# Altium PCB imx6_base_board_lcd7_r1.PcbDoc (part 2 of 6)
Units mil, origin at the board's own origin, x right, y up, seen from the top; angles counter-clockwise.
Board outline 7480.32 x 5118.11 mil, 4 copper layers (Top Layer, Internal Plane 1, Internal Plane 2, Bottom Layer), stack 30.635 mil thick; 518 components, 398 nets, 1886 pads, 1407 vias.
Unrouted connection lines stored in the file: 12.
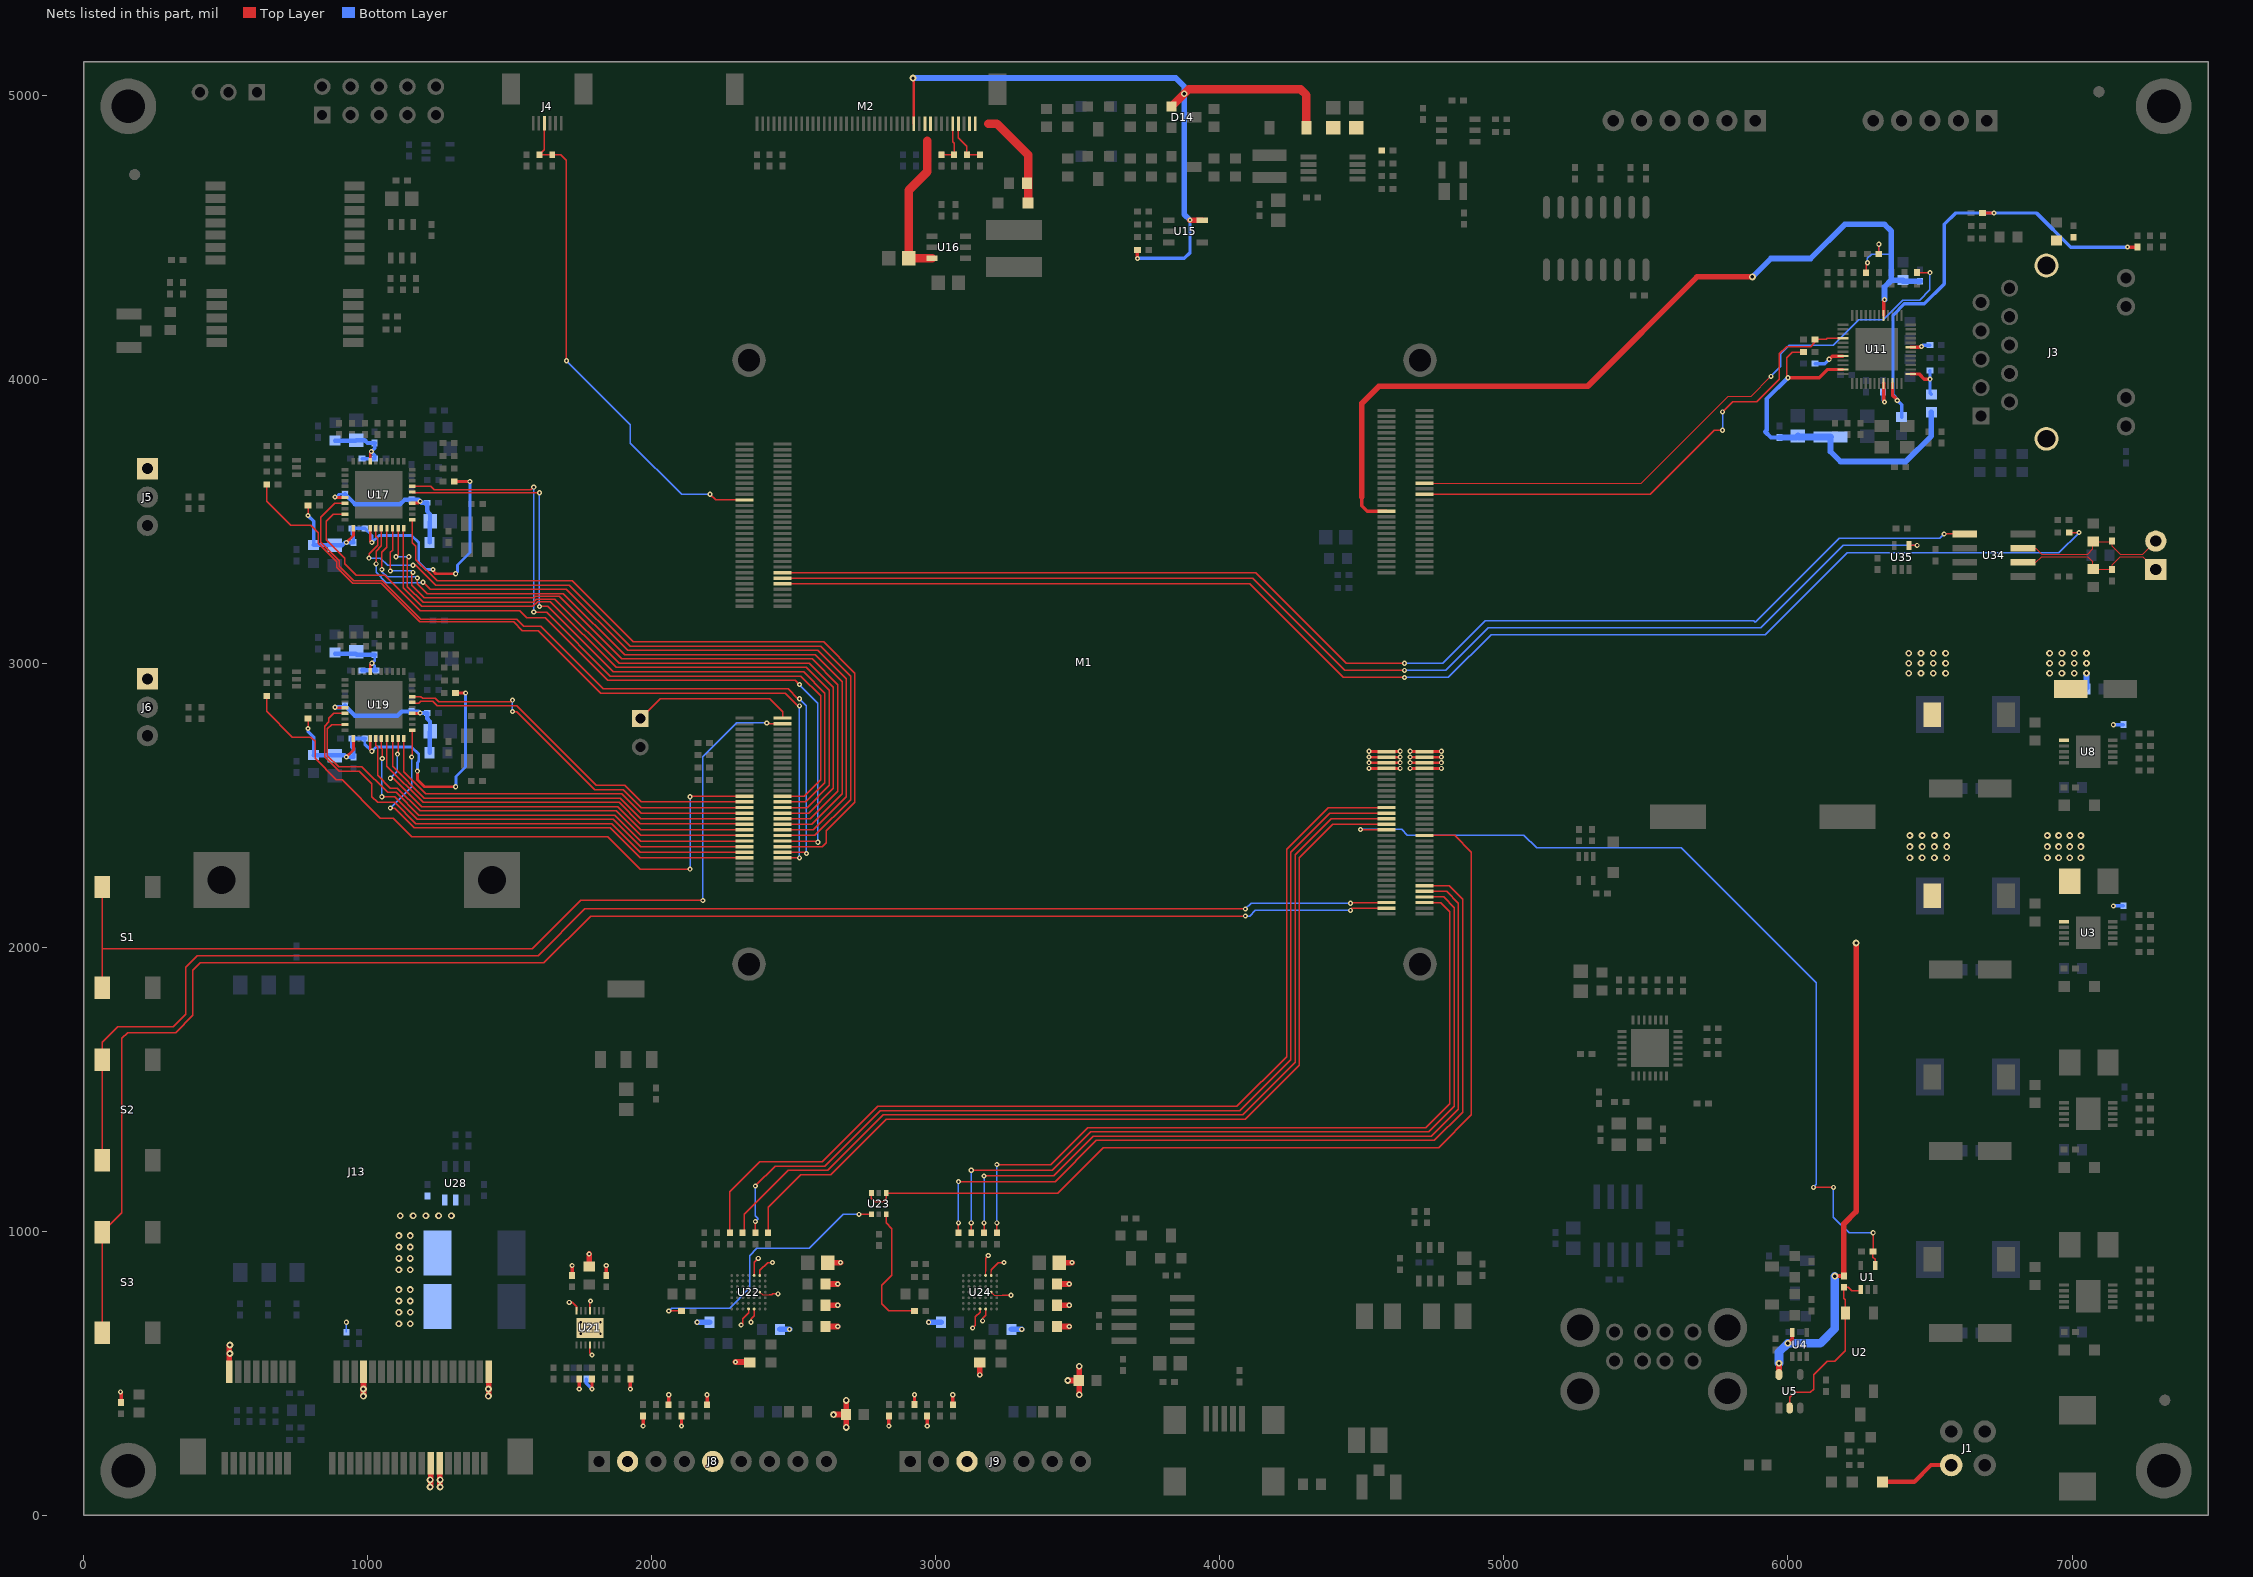
[diagram p4: the nets of this part, all layers, seen from the top]

## Part data
BT1: library part Battery, "Multicell Battery"
C1 C3 C4 C5 C7 C9 C10 C11 C13 C15 C16 C17 C19 C20 C22 C23 C25 C26 C27 C28 C29 C30 C31 C32 C33 C34 C35 C36 C37 C38 C39 C40 C41 C42 C43 C44 C45 C46 C48 C49 C50 C51 C52 C53 C54 C67 C68 C69 C70 C71 C72 C73 C74 C75 C76 C77 C78 C79 C80 C81 C82 C83 C84 C85 C86 C87 C88 C89 C90 C91 C92 C93 C94 C95 C96 C97 C98 C99 C100 C101 C102 C103 C104 C105 C106 C107 C108 C109 C110 C111 C112 C113 C114 C115 C116 C117 C118 C119 C120 C121 C122 C123 C124 C125 C126 C127 C128 C129 C130 C131 C132 C133 C134 C135 C136 C137 C138 C139 C140 C141 C142 C143 C144 C145 C146 C147 C148 C149 C150 C151 C152 C153 C154 C155 C156 C157 C158 C159 C160 C161 C162 C163 C164 C165 C166 C170 C174 C175: library part Cap, "Capacitor"
C2 C6 C8 C12 C14 C18 C21 C24 C183 C184: library part "CAP WP"
C47 C178 C179 C180 C181 C182 C185 C186 C187 C188 C189 C190 C191 C192 C193 C194 C195 C196 C197 C198: library part "P_CAP NP"
C55 C56: library part C2012X5R1E106K125AB, "CAP, CERM, 10 μF, 25 V, +/- 10%, X5R, 0805"
C57 C63: library part GRM219R61A106KE44D, "CAP, CERM, 10 μF, 10 V, +/- 10%, X5R, 0805"
C58 C61 C64: library part GRM188R61H105KAALD, "CAP, CERM, 1 μF, 50 V, +/- 10%, X5R, 0603"
C59: library part GRM155R71H332KA01D, "CAP, CERM, 3300 pF, 50 V, +/- 10%, X7R, 0402"
C60 C62 C65 C66: library part GRM155R71C104KA88D, "CAP, CERM, 0.1 μF, 16 V, +/- 10%, X7R, 0402"
C167 C168 C169 C171 C172 C173 C176 C177: library part CAP_Dup1
C199 C200 C201 C202 C203: library part CAP
D1 D3 D4 D5 D6 D7 D8 D9 D10 D11 D12 D19: library part "Diode 11DQ03", "Schottky Rectifier"
D2: library part MMGZ5231BPTLL34
D13 D20: library part LN01401_1
D14 D15: "Diode, Schottky, 30 V, 0.2 A, SOT-23"
D16: "Diode, Zener, 7.5 V, 200 mW, SOD-323F"
D17: library part MM3Z18VB, "Diode, Zener, 18 V, 200 mW, SOD-323F"
D18: "Diode, Schottky, 20 V, 1 A, SOD-123FL"
J1: library part "Header 4", "Header, 4-Pin"
J2 J18: library part "Header 2", "Header, 2-Pin"
J4 J20: library part "Header 6", "Header, 6-Pin"
J5 J6 J16: library part "Header 3", "Header, 3-Pin"
J8: library part "Header 9", "Header, 9-Pin"
J9: library part "Header 7", "Header, 7-Pin"
J10: library part "Header 12", "Header, 12-Pin"
J11: library part FOX_UH51543-JS7
J14 J15: library part HRS_U_0.FL-R-SMT-10
J17: library part "Header 5X2", "Header, 5-Pin, Dual row"
J19: library part "Header 5", "Header, 5-Pin"
L1 L2 L3 L4: library part INDUCTOR_A, "IND CHK PWR 2.2UH@1MHZ 3.2A 20% SMT"
L5 L7 L10 L11 L12 L13 L14 L15 L16 L17 L18 L19 L20 L21 L22 L23 L25: library part Inductor, "Inductor"
L6 L8 L9: library part INDUCTOR, "IND PWR 4.7UH@1MHZ 1A 20% SMD"
L24: library part 2.2UH_LPS3015-222MLC_1.5A_20%~D
Q1: library part MMBT3904_NL_SOT23-3
Q2 Q8: library part AO3401L_SOT23-3_0
Q3 Q4 Q5 Q9: library part MOSFET-N, "N-Channel MOSFET"
Q6: library part PNP, "PNP Bipolar Transistor"
Q7: library part NPN, "NPN Bipolar Transistor"
R1 R2 R3 R12 R31 R32 R33 R34 R35 R36 R37 R38 R39 R40 R41 R42 R43 R44 R45 R46 R47 R48 R49 R50 R51 R52 R53 R54 R55 R56 R57 R58 R82 R85 R87 R88 R89 R90 R91 R92 R93 R94 R95 R96 R97 R98 R99 R100 R101 R102 R103 R104 R105 R106 R107 R108 R109 R110 R111 R112 R113 R114 R115 R116 R117 R118 R119 R120 R121 R122 R123 R124 R125 R126 R127 R128 R129 R130 R131 R132 R133 R134 R135 R136 R137 R138 R139 R140 R141 R142 R143 R144 R145 R146 R147 R148 R149 R150 R151 R152 R153 R154 R155 R156 R157 R166 R168 R169 R187 R188 R189 R190: library part CR16-1003FM
R4 R6 R8 R9 R10 R11 R13 R14 R15 R16 R17 R18 R19 R20 R21 R22 R23 R24 R25 R26 R27 R28 R29 R30: library part Res3, "Resistor"
R5 R7: library part R
R59 R60 R61 R62 R63 R64 R65 R66 R67 R68 R69 R70 R71 R72 R73 R74 R75 R76 R77 R78 R79 R80 R81 R83 R84 R86 R158 R159 R160 R161 R162 R163 R164 R165 R167 R170 R171 R172 R173 R174 R175 R176 R177 R178 R179 R180 R181 R182 R183 R184 R185 R186: library part P_R
S1 S2 S3: library part SW-PB, "Switch"
U2: library part Optoisolator1, "4-Pin Phototransistor Optocoupler"
U3 U6 U7 U8: library part LT3680_MSOP_10P, "IC VREG STEP DOWN SW 2.4MHZ 3.5A 0.79V-30V 3.6V-36V MSOP10"
U5: library part 74LVC1G04GW_SOT353-5
U9: library part LD1117AS18, "IC VREG LDO 1.8V 1A 10V SOT-223"
U11: library part AR8031_QFN48, "IC XCVR ETHERNET PHY 10/100/1000G-BIT 3.3V QFN48"
U12 U28 U29 U32: library part TPS27081A
U13: library part TPS61085DGKR, "18.5 V, 2 A, 650 KHz / 1.2 MHz Step-Up DC-DC Converter with Forced PWM Mode, 2.3 to 6 V, -40 to 85 degC, 8-pin SOP (DGK8), Green (RoHS & no Sb/Br)"
U14: library part STM6315
U15: "Single 30V High Output Current and Unlimited Capacitive Load Op Amp"
U21: library part MAX9814_TDFN14, "IC LIN AGC AMP 2.7-5.5V TDFN14"
U22 U24: library part WM8962_BGA_49P_CUST, "IC AUDIO CODEC 24BIT DAC 2 CH ADC 1.8V BGA49"
U23: library part NC7WZ17, "IC BUF DUAL SCHMITT 1.65-5.5V SC70-6"
U25 U27: library part MIC2526_8P, "IC LIN SW PWR ACTIVE HIGH DUAL 2.7V-5.5V 0.5A SOIC8"
U30: library part NEO-5M
U34: library part TJA1040T_SO_8P, "IC XCVR CAN HS 5V SO8"
Y1: library part XTAL_13Y, "XTAL 25MHZ -- -- SMT"
Y2 Y3 Y4: library part CRYSTAL_JXS63, "XTAL 28.63636MHZ 10PF RSN -- SMT"

## Free pads (board coordinates)
  round 196.85 hole 118.11: MT1(7322.83,157.48) MT2(157.48,157.48) MT3(157.48,4960.63) MT4(7322.83,4960.63)

## Via types
v1: diameter 18, hole 8, Top Layer to Bottom Layer, tented both sides, 875 vias
v2: diameter 24, hole 12, Top Layer to Bottom Layer, tented both sides, 532 vias

## Nets (pads, with @x,y where several pads share a name; then routed paths per layer and width w, separated by ;. In a path a pad name is that pad's centre, name@x,y a point inside that pad or via, vN(x,y) a via of type N, cw(c..) or ccw(c..) an arc to the next point about the centre after c; other vN are vias at no path point)
2V5-RGMII: C30.1 R49.2 R50.2 U11.10 | length 1660.2
  Top Layer w12: U11.10@6368.07,3985.2 6368.07,3943.93 6385,3927 v1(6385,3925) ; R49.2@6684.87,4585 v1(6725,4585) ; v1(7195,4465) 7229.87,4465 R50.2@7230,4465.13
  Bottom Layer w12: C30.1@6400,3866.5 6400,3910 v1(6385,3925) 6385,3930 6370,3945 6370,4225 6410,4265 6480,4265 6550,4335 6550,4545 6590,4585 v1(6725,4585) 6875,4585 6995,4465 v1(7195,4465)
3V3-VIDEO1: C69.1 C79.1 C94.2 C95.2 L13.2 R89.2 R91.2 U17.1 U17.4 | length 1363.2
  Top Layer w4.7: v1(790,3520) 790.13,3520.13 R89.2@790.13,3555
  Top Layer w10: v1(925,3425) 950,3450 U17.1@950,3475 ; U17.4@1009.05,3475 1009.05,3430.94 v1(1015,3425) ; v1(1230,3330) 1230,3325 1240,3315 v1(1310,3315) ; R91.2@1304.87,3640 v1(1360,3640)
  Bottom Layer w10: C94.2@990.13,3475 1015,3450.13 v1(1015,3425) 1040,3450 1155,3450 1180,3425 1180,3355 1205,3330 v1(1230,3330) ; v1(1310,3315) 1316,3321 1316,3346 1360,3390 v1(1360,3640)
  Bottom Layer w12: v1(790,3520) 810,3500 L13.2@810,3416.5 ; C69.1@950,3425.13 950,3450 944.87,3455.13 C95.2@944.87,3475 C94.2@990.13,3475
  Bottom Layer w15: L13.2@810,3416.5 883.5,3416.5 C79.1@885,3415 910,3415 v1@920.13,3425.13 ; v1@925,3425.13 C69.1@950,3425.13
3V3-VIDEO2: C99.1 C100.1 C124.2 C125.2 L17.2 R102.2 R104.2 U19.1 U19.4 | length 1378.3
  Top Layer w4.7: v1(790,2770) 790,2765.25 790.13,2765.13 R102.2@790.13,2805
  Top Layer w10: v1(925,2670) 950,2695 U19.1@950,2735 ; U19.4@1009.05,2735 1009.05,2695.94 v1(1015,2690) ; v1(1175,2620) 1175,2590 1200,2565 v1(1310,2565) ; R104.2@1309.87,2895 v1(1345,2895)
  Bottom Layer w10: C124.2@990.13,2735 990.13,2714.87 v1(1015,2690) 1030,2705 1155,2705 1180,2680 1180,2655 1175,2650 v1(1175,2620) ; v1(1310,2565) 1311,2566 1311,2601 1345,2635 v1(1345,2895)
  Bottom Layer w12: v1(790,2770) 790,2760 810,2740 L17.2@810,2676.5
  Bottom Layer w15: L17.2@810,2676.5 918.5,2676.5 v1(925,2670) 949.87,2670 C99.1@950,2670.13 950,2700 944.87,2705.13 C125.2@944.87,2735 C124.2@990.13,2735
12V-CAM: C24.1 C25.1 J5.1 J6.1 L4.2 R28.1 U8.1 | length 92.4
  Bottom Layer w12: v1(7145.67,2783.46) 7146.11,2783.91 R28.1@7181.1,2783.91
  Bottom Layer w20: C25.1@7047.24,2909.45 7051.18,2913.39 v2(7051.18,2964.57)
  other v2: 6425.2,2964.57 6468.5,2964.57 6511.81,2964.57 6555.12,2964.57 6921.26,2964.57 6964.57,2964.57 7007.87,2964.57 6425.2,3000 6468.5,3000 6511.81,3000 6555.12,3000 6921.26,3000 6964.57,3000 7007.87,3000 7051.18,3000 6425.2,3035.43 6468.5,3035.43 6511.81,3035.43 6555.12,3035.43 6921.26,3035.43 6964.57,3035.43 7007.87,3035.43 7051.18,3035.43
ACC-INPUT: D2.1 J1.2 | length 266.6
  Top Layer w15: D2.1@6332.68,118.11 6444.88,118.11 6503.94,177.17 J1.2@6574.8,177.17
ACC-ISO: R2.2 U1.1 U2.4 U5.2 | length 622.3
  Top Layer w4.7: U5.2@6005.91,377.95 6005.91,415.35 6023.62,433.07 6078.74,433.07 6090.55,444.88 6090.55,496.06 6137.8,543.31 6165.35,543.31 6201.97,579.92 U2.4@6201.97,712.6 6201.97,758.66 6196.85,763.78 R2.2@6196.85,802.96 6212.79,802.96 6224.41,791.34 6251.97,791.34 U1.1@6255.91,795.28
ACC-STATUS: M1.D29 R3.2 U1.4 | length 3101
  Top Layer w4.7: v1(4495,2415) 4496.61,2413.39 M1.D29@4586.61,2413.39 ; v1(6090,1155) v1(6160,1155) ; v1(6300,995) 6300,929.73 R3.2@6299.4,929.13 6299.4,909.26 6307.1,901.56 U1.4@6307.1,880.28
  Bottom Layer w4.7: v1(4495,2415) 4640,2415 4660,2395 5070,2395 5115,2350 5625,2350 6100,1875 6100,1165 v1(6090,1155) ; v1(6160,1155) 6160,1050 6215,995 v1(6300,995)
AGND1: C128.1 C129.2 C131.2 C132.2 C133.1 C135.1 C139.1 C140.1 C145.1 C146.1 C148.1 J8.2 J8.5 L19.2 R117.2 R118.2 R119.2 R120.2 R121.2 R122.2 R123.2 U21.4 U21.7 U21.11 U21.15 U22.B1 U22.B4 U22.C1 U22.C7 U22.D7 | length 1294.7
  Top Layer w3: U22.B4@2380.31,785.94 2390.25,776 2414,776
  Top Layer w4.7: v1(1710,750) 1720,750 1735.52,734.48 U21.7@1735.52,720 ; U21.11@1782.76,599.92 1782.76,572.24 v1(1790,565) ; U21.4@1782.76,720 1782.76,752.76 v1(1785,755) ; v1(2315,670) 2320.3,675.3 2320.3,692.02 2340.94,712.66 U22.D7@2340.94,726.88 ; v1(2350,680) 2350,693 2360.3,703.3 2360.3,726.55 U22.C7@2360.63,726.88 ; U22.C1@2360.63,845 2360.7,845.07 2360.7,890.7 v1(2375,905) ; U22.B1@2380.31,845 2380.7,845.39 2380.7,862.7 2408,890 v1(2425,890) ; 2414,776 2423,776 2427,780 v1(2445,780)
  Top Layer w12: C128.1@1720,845.13 v1(1720,880) ; v1(1745,445) R119.2@1745,480.13 ; v1(1790,445) C129.2@1790,480.13 ; C132.2@1840,844.87 v1(1840,880) ; v1(1925,445) R117.2@1925,480.13 ; v1(1970,315) R121.2@1970,350.13 ; R120.2@2060,389.87 v1(2060,425) ; v1(2105,315) R122.2@2105,350.13 ; R123.2@2195,389.87 v1(2195,425)
  Top Layer w20: C131.2@1780,876.5 v1(1780,920) ; v1(2295,540) 2343.5,540 C148.1@2345,538.5 ; C146.1@2611.5,665 v1(2655,665) ; C145.1@2611.5,740 v1(2655,740) ; C135.1@2611.5,815 v1(2655,815) ; C133.1@2620,890 v1(2665,890) ; v2(2640,355) L19.2@2683.5,355 ; v2(2685,310) 2683.5,311.5 2685,312.99 v2(2685,405)
  Bottom Layer w12: R118.2@1770,480.13 1770,465 v1(1790,445)
  Bottom Layer w20: v1(2160,680) C139.1@2203.5,680 ; C140.1@2451.5,655 v1(2485,655)
  other v1: 1750,640 1820,640 1785,660 1750,680 1820,680
AGND2: C149.1 C151.1 C155.1 C156.1 C159.1 C160.1 C161.1 J9.3 L21.2 R131.2 R132.2 R133.2 R134.2 U24.B1 U24.B4 U24.C1 U24.C7 U24.D7 | length 924.4
  Top Layer w3: U24.C1@3175.63,845 3175.63,859.37 ; U24.B4@3195.31,785.94 3205.5,775.75 3234.25,775.75 ; U24.B1@3195.31,845 3195.31,859.69 ; v1@3264.25,775.75 3265,776.5 v1(3265,775)
  Top Layer w4.7: v1(3130,660) 3138.95,668.95 3138.95,698.95 3155.94,715.94 U24.D7@3155.94,726.88 ; v1(3165,685) 3165,695 3175.3,705.3 3175.3,726.55 U24.C7@3175.63,726.88 ; 3175.63,859.37 3175.63,905.63 v1(3185,915) ; 3195.31,859.69 3195.31,865.31 3220,890 v1(3240,890) ; 3234.25,775.75 v1@3264.25,775.75
  Top Layer w12: v1(2835,315) R134.2@2835,350.13 ; v1(2925,425) 2925.2,424.8 R131.2@2925.2,390.2 ; v1(2970,315) R132.2@2970,350.13 ; R133.2@3060,389.87 v1(3060,425)
  Top Layer w20: v1(3155,495) C161.1@3155,538.5 ; C160.1@3426.5,665 v1(3470,665) ; C159.1@3426.5,740 v1(3470,740) ; C151.1@3426.5,815 v1(3470,815) ; C149.1@3435,890 v1(3480,890) ; v2@3470,475 L21.2@3503.5,475 ; v2@3505,422.99 v2(3505,425) 3505,522.01 3503.5,523.5 v2(3505,525)
  Bottom Layer w20: v1(2975,680) C155.1@3018.5,680 ; C156.1@3266.5,655 v1(3302.65,655)
  other v2: 3465,475
AUD3-RXD: M1.D27 R129.2 | length 3252.8
  Top Layer w4.7: R129.2@2410,994.87 2410,1085 2525,1200 2630,1200 2825,1395 4090,1395 4280,1585 4280,2315 4398.07,2433.07 M1.D27@4586.61,2433.07
AUD3-TXC: M1.D21 R126.2 | length 3444.4
  Top Layer w4.7: R126.2@2275,994.87 2275,1140 2380,1245 2600,1245 2795,1440 4060,1440 4235,1615 4235,2345 4382.13,2492.13 M1.D21@4586.61,2492.13
AUD3-TXD: M1.D23 R128.2 | length 3366.3
  Top Layer w4.7: R128.2@2365,994.87 v1(2365,1035) ; v1(2365,1160) 2435,1230 2610,1230 2805,1425 4070,1425 4250,1605 4250,2335 4387.44,2472.44 M1.D23@4586.61,2472.44
  Bottom Layer w4.7: v1(2365,1035) 2375,1045 2365,1055 v1(2365,1160)
AUD3-TXFS: M1.D25 R127.2 | length 3333.3
  Top Layer w4.7: R127.2@2320,994.87 2325,999.87 2325,1060 2480,1215 2620,1215 2815,1410 4080,1410 4265,1595 4265,2325 4392.76,2452.76 M1.D25@4586.61,2452.76
AUD4-RXD: M1.D56 R140.2 | length 2702.2
  Top Layer w4.7: R140.2@3215,994.87 v1(3215,1030) ; v1(3215,1235) 3405,1235 3535,1365 4725,1365 4810,1450 4810,2125 4777.52,2157.48 M1.D56@4720.47,2157.48
  Bottom Layer w4.7: v1(3215,1030) v1(3215,1235)
AUD4-TXC: M1.D50 R137.2 | length 2960.4
  Top Layer w4.7: R137.2@3080,994.87 v1(3080,1030) ; v1(3080,1175) 3420,1175 3565,1320 4755,1320 4855,1420 4855,2170 4808.46,2216.54 M1.D50@4720.47,2216.54
  Bottom Layer w4.7: v1(3080,1030) v1(3080,1175)
AUD4-TXD: M1.D52 R139.2 | length 2829.3
  Top Layer w4.7: R139.2@3170,994.87 v1(3170,1030) ; v1(3170,1195) 3415,1195 3555,1335 4745,1335 4840,1430 4840,2155 4798.15,2196.85 M1.D52@4720.47,2196.85
  Bottom Layer w4.7: v1(3170,1030) v1(3170,1195)
AUD4-TXFS: M1.D54 R138.2 | length 2833.2
  Top Layer w4.7: R138.2@3125,994.87 v1(3125,1030) ; v1(3125,1215) 3410,1215 3545,1350 4735,1350 4825,1440 4825,2140 4787.83,2177.17 M1.D54@4720.47,2177.17
  Bottom Layer w4.7: v1(3125,1030) v1(3125,1215)
AUD-CLK-1: R130.2 U23.4 | length 966.6
  Top Layer w4.7: v1(2060,720) R130.2@2105.13,720 ; v1(2730,1060) 2773.62,1060 U23.4@2773.8,1060.18
  Bottom Layer w4.7: v1(2060,720) 2070,730 2274,730 2345,801 2345,915 2370,940 2555,940 2675,1060 v1(2730,1060)
AUD-CLK-2: R141.2 U23.6 | length 463.4
  Top Layer w4.7: U23.6@2825,1060.18 2825,1030 2845,1010 2845,845 2810,810 2810,745 2835,720 R141.2@2925.13,720
AUD-MCLK: M1.D32 U23.1 U23.3 | length 3386.5
  Top Layer w4.7: U23.3@2773.8,1135 2773.8,1116.2 2785,1105 2815,1105 2825,1115 U23.1@2825,1135 3430,1135 3590,1295 4770,1295 4885,1410 4885,2335 4826.3,2393.7 M1.D32@4720.47,2393.7
AVDD: C55.1 C56.1 D14.1 D18.1 M2.29 R66.1 R68.1 U15.5 | length 2611.9
  Top Layer w10: v2(2920,5060) 2922.32,5057.68 M2.29@2922.32,4899.37
  Top Layer w12: R68.1@3709.87,4455 3709.87,4425.13 v1(3710,4425)
  Top Layer w20: v1(3895,4560) U15.5@3938.11,4560
  Top Layer w30: D14.1@3830,4960 3890,5020 4285,5020 4305,5000 D18.1@4305,4885
  Bottom Layer w12: v1(3710,4425) 3875,4425 3895,4445 v1(3895,4560)
  Bottom Layer w20: v2(2920,5060) 3845,5060 3875,5030 3875,4580 v1(3895,4560)
  other v2: 3875,5005
AVDD-1V8-VIDEO1: C75.1 C76.1 C89.2 C91.2 L12.2 U17.27 | length 282.8
  Top Layer w10: U17.27@1009.05,3711.22 v1@1009.05,3739.06
  Bottom Layer w12: C75.1@980.13,3720 C89.2@1025.13,3720 1025.13,3732.87 v1(1013,3745) 1025,3757 C91.2@1025,3775.13
  Bottom Layer w15: L12.2@885,3783.5 958.5,3783.5 C76.1@960,3785 990,3785 1000,3775 1024.87,3775 C91.2@1025,3775.13
AVDD-1V8-VIDEO2: C105.1 C106.1 C119.2 C121.2 L16.2 U19.27 | length 288.2
  Top Layer w10: U19.27@1009.05,2971.22 1009.05,2994.05 v1(1015,3000)
  Bottom Layer w10: C121.2@1025,3030.13 1025,3010 v1(1015,3000) 1025,2990 1025,2980.13 C119.2@1030.13,2975
  Bottom Layer w15: L16.2@885,3033.5 958.5,3033.5 961.88,3030.13 C121.2@1025,3030.13 ; C105.1@980.13,2975 C119.2@1030.13,2975
BL-LED+: C64.1 D19.2 M2.39 M2.40 | length 355.6
  Top Layer w30: 3185,4900 3215,4900 3325,4790 D19.2@3325,4620
BL-LED-: M2.31 M2.32 R72.1 U16.6 | length 523.8
  Top Layer w30: 2970,4840 2970,4730 2905,4665 R72.1@2905,4425 U16.6@2986.89,4425
BM-SEL: J2.1 M1.B2 | length 570.8
  Top Layer w4.7: J2.1@1960,2805 2030,2875 2415,2875 2460.63,2829.37 M1.B2@2460.63,2807.09
BUTTON1: M1.B4 S1.2 | length 3379.7
  Top Layer w4.7: S1.2@66.42,1857.83 S1.2@66.42,2212.17 ; 66.42,1995 1580,1995 1750,2165 v1(2180,2165) ; v1(2405,2790) 2405,2789.8 2402.6,2787.4 M1.B4@2460.63,2787.4
  Bottom Layer w4.7: v1(2180,2165) 2180,2670 2300,2790 v1(2405,2790)
BUTTON2: M1.D55 S2.2 | length 5236.3
  Top Layer w4.7: S2.2@66.42,1250.33 S2.2@66.42,1604.67 66.42,1666.42 120,1720 315,1720 360,1765 360,1930 400,1970 1600,1970 1765,2135 v1(4090,2135) ; v1(4460,2155) 4462.48,2157.48 M1.D55@4586.61,2157.48
  Bottom Layer w4.7: v1(4090,2135) 4110,2155 v1(4460,2155)
BUTTON3: M1.D57 S3.2 | length 5803.5
  Top Layer w4.7: S3.2@66.42,642.83 S3.2@66.42,997.17 135,1065.75 135,1680 155,1700 325,1700 385,1760 385,1920 410,1945 1620,1945 1785,2110 v1(4090,2110) ; v1(4460,2130) 4460,2135 4462.8,2137.8 M1.D57@4586.61,2137.8
  Bottom Layer w4.7: v1(4090,2110) 4105,2110 4125,2130 v1(4460,2130)
CABCEN0: M2.37 R84.2 R86.2 | length 167
  Top Layer w4.7: M2.37@3079.8,4899.37 3079.8,4850.2 3110,4820 R84.2@3110,4789.87 R86.2@3155,4789.87
CABCEN1: M2.36 R81.2 R83.2 | length 156.6
  Top Layer w4.7: R81.2@3020,4789.87 R83.2@3065,4789.87 3065,4830 3060,4835 3060,4845 3060.12,4845.12 M2.36@3060.12,4899.37
CAN-RX: M1.A50 U35.4 | length 4339.7
  Top Layer w4.7: M1.A50@2460.63,3299.21 4115.79,3299.21 4440,2975 v1(4650,2975) ; U35.4@6426.2,3415 v1(6455,3415)
  Bottom Layer w4.7: v1(4650,2975) 4795,2975 4945,3125 5905,3125 6195,3415 v1(6455,3415)
CAN-STBY: M1.A52 R185.1 | length 4947
  Top Layer w4.7: M1.A52@2460.63,3279.53 4105.47,3279.53 4435,2950 v1(4650,2950) ; R185.1@6990.13,3460 v1(7025,3460)
  Bottom Layer w4.7: v1(4650,2950) 4805,2950 4955,3100 5920,3100 6208.65,3388.65 6953.65,3388.65 v1(7025,3460)
CAN-TX: M1.A48 U34.1 | length 4486.7
  Top Layer w4.7: M1.A48@2460.63,3318.9 4126.1,3318.9 4445,3000 v1(4650,3000) ; v1(6550,3455) U34.1@6622.64,3455
  Bottom Layer w4.7: v1(4650,3000) 4785,3000 4935,3150 5880,3150 5885,3145 6180,3440 6535,3440 v1(6550,3455)
CAN_N: C197.1 J18.1 R184.2 U34.6 | length 554.6
  Top Layer w3.8: U34.6@6827.36,3355 6872.57,3355 6893.07,3375.5 7055,3375.5 7073.1,3357.4 7073.1,3333.4 C197.1@7075,3331.5 7141.62,3331.5 7141.9,3331.77 7141.9,3347.4 7170,3375.5 7249.5,3375.5 J18.1@7295,3330
CAN_P: C193.2 J18.2 R182.1 U34.7 | length 555.6
  Top Layer w3.8: U34.7@6827.36,3405 6872.57,3405 6893.07,3384.5 7055,3384.5 7073.1,3402.6 7073.1,3426.6 C193.2@7075,3428.5 7138.63,3428.5 R182.1@7140,3429.87 7141.9,3427.97 7141.9,3412.6 7170,3384.5 7249.5,3384.5 J18.2@7295,3430
CAP-TCH-INT: J4.4 M1.A21 R82.1 R85.1 | length 1793.5
  Top Layer w4.7: J4.4@1622.28,4900.28 1622.28,4807.41 R85.1@1605,4790.13 R82.1@1650,4790.13 1679.87,4790.13 1700,4770 v1(1700,4065) ; v1(2205,3595) 2225.2,3574.8 M1.A21@2326.77,3574.8
  Bottom Layer w4.7: v1(1700,4065) 1925,3840 1925,3775 2105,3595 v1(2205,3595)
CELL-3V3: C178.1 C183.1 C184.1 J13.2 J13.24 J13.39 J13.41 J13.52 R166.1 R168.2 U28.2 U28.3 | length 509.8
  Top Layer w12: v1(130,435) 132.01,432.99 R166.1@132.01,397.88
  Top Layer w20: J13.2@513.31,506.42 513.31,598.31 v2(515,600) ; v2(985,420) 985.75,420.75 J13.24@985.75,506.42 ; v2(1220,100) 1221.97,101.97 J13.39@1221.97,183.58 ; J13.41@1253.46,183.58 1253.46,101.54 v2(1255,100) ; v2(1425,420) 1426.69,421.69 J13.52@1426.69,506.42
  Bottom Layer w4.7: R168.2@925,644.87 v1(925,680)
  other v2: 1220,125 1255,125 985,445 1425,445 515,570 1110,675 1150,675 1110,715 1150,715 1110,755 1150,755 1110,795 1150,795 1110,865 1150,865 1110,905 1150,905 1110,945 1150,945 1110,985 1150,985 1115,1055 1160,1055 1205,1055 1250,1055 1295,1055
CPU-3V3: C6.1 L1.2 M1.D1 M1.D2 M1.D3 M1.D4 M1.D5 M1.D6 M1.D7 M1.D8 R2.1 R8.1 U3.1 U4.5 U5.5 | length 2680
  Top Layer w10: v1(4525,2630) 4525.08,2629.92 M1.D7@4586.61,2629.92 4634.92,2629.92 v1(4635,2630) ; v1(4525,2650) 4525.39,2649.61 M1.D5@4586.61,2649.61 4634.61,2649.61 v1(4635,2650) ; v1(4525,2670) 4525.71,2669.29 M1.D3@4586.61,2669.29 4634.29,2669.29 v1(4635,2670) ; v1(4525,2690) 4526.02,2688.98 M1.D1@4586.61,2688.98 4633.98,2688.98 v1(4635,2690) ; v1(4670,2630) 4670.08,2629.92 M1.D8@4720.47,2629.92 4779.92,2629.92 v1(4780,2630) ; v1(4670,2650) 4670.39,2649.61 M1.D6@4720.47,2649.61 4779.61,2649.61 v1(4780,2650) ; v1(4670,2670) 4670.71,2669.29 M1.D4@4720.47,2669.29 4779.29,2669.29 v1(4780,2670) ; v1(4670,2690) 4671.02,2688.98 M1.D2@4720.47,2688.98 4778.98,2688.98 v1(4780,2690)
  Top Layer w12: v2(6000,606.3) 6015.75,622.05 U4.5@6015.75,644.06
  Top Layer w15: v2(6165.35,842.52) 6196.41,842.52 R2.1@6196.85,842.96
  Top Layer w20: U5.5@5968.5,496.06 v2(5968.5,535.43) ; R2.1@6196.85,842.96 6196.85,1026.85 6240,1070 v2(6240,2015)
  Bottom Layer w12: v1(7145.67,2145.67) 7146.11,2146.11 R8.1@7181.1,2146.11
  Bottom Layer w30: v2(5968.5,535.43) 5968.5,574.8 v2(6000,606.3) 6114.17,606.3 6165.35,657.48 v2(6165.35,842.52)
  other v2: 6429.13,2314.96 6472.44,2314.96 6515.75,2314.96 6559.06,2314.96 6913.39,2314.96 6952.76,2314.96 6992.13,2314.96 7031.5,2314.96 6429.13,2354.33 6472.44,2354.33 6515.75,2354.33 6559.06,2354.33 6913.39,2354.33 6952.76,2354.33 6992.13,2354.33 7031.5,2354.33 6429.13,2393.7 6472.44,2393.7 6515.75,2393.7 6559.06,2393.7 6913.39,2393.7 6952.76,2393.7 6992.13,2393.7 7031.5,2393.7
CSI0-DAT12: M1.B30 U17.17 | length 2463.5
  Top Layer w4.7: U17.17@1156.69,3622.64 1222.36,3622.64 1235,3610 1575,3610 v1(1585,3620) ; v1(1585,3180) 1630,3180 1855,2955 2525,2955 2595,2885 2595,2590 2536.5,2531.5 M1.B30@2460.63,2531.5
  Bottom Layer w4.7: v1(1585,3180) v1(1585,3620)
CSI0-DAT13: M1.B32 U17.16 | length 2475.2
  Top Layer w4.7: U17.16@1156.69,3602.95 1156.69,3600.3 1420,3600.3 1420,3600 v1(1605,3600) ; v1(1605,3200) 1635,3200 1865,2970 2535,2970 2610,2895 2610,2580 2541.81,2511.81 M1.B32@2460.63,2511.81
  Bottom Layer w4.7: v1(1605,3200) v1(1605,3600)
CSI0-DAT14: M1.B34 U17.10 | length 2405.2
  Top Layer w4.7: U17.10@1127.16,3475 1125,3472.84 1125,3265 1190,3200 1581.88,3200 1598.23,3216.35 1643.65,3216.35 1875,2985 2545,2985 2625,2905 2625,2570 2547.13,2492.13 M1.B34@2460.63,2492.13
CSI0-DAT15: M1.B36 U17.9 | length 2482
  Top Layer w4.7: v1(1100,3375) 1107.48,3382.48 U17.9@1107.48,3475 ; v1(1145,3375) 1140,3370 1140,3270 1195,3215 1583.16,3215 1594.21,3226.05 1658.95,3226.05 1885,3000 2555,3000 2640,2915 2640,2560 2552.44,2472.44 M1.B36@2460.63,2472.44
  Bottom Layer w4.7: v1(1100,3375) v1(1145,3375)
CSI0-DAT16: M1.B38 U17.8 | length 2544.7
  Top Layer w4.7: v1(1080,3325) 1080,3390 1087.8,3397.8 U17.8@1087.8,3475 ; v1(1160,3320) 1155,3320 1155,3275 1200,3230 1584.44,3230 1590.19,3235.75 1674.25,3235.75 1895,3015 2565,3015 2655,2925 2655,2550 2557.76,2452.76 M1.B38@2460.63,2452.76
  Bottom Layer w4.7: v1(1080,3325) 1155,3325 v1(1160,3320)
CSI0-DAT17: M1.B40 U17.7 | length 2601.3
  Top Layer w4.7: v1(1050,3330) 1050,3390 1068.11,3408.11 U17.7@1068.11,3475 ; v1(1175,3300) 1175,3280 1209.55,3245.45 1689.55,3245.45 1905,3030 2575,3030 2670,2935 2670,2540 2563.07,2433.07 M1.B40@2460.63,2433.07
  Bottom Layer w4.7: v1(1050,3330) 1050,3321.88 1068.23,3303.65 1171.35,3303.65 v1(1175,3300)
CSI0-DAT18: M1.B42 U17.6 | length 2661.8
  Top Layer w4.7: v1(1030,3350) 1030,3395 1048.43,3413.43 U17.6@1048.43,3475 ; v1(1195,3285) 1220,3260 1700,3260 1915,3045 2585,3045 2685,2945 2685,2530 2568.39,2413.39 M1.B42@2460.63,2413.39
  Bottom Layer w4.7: v1(1030,3350) 1030,3320 1066.35,3283.65 1193.65,3283.65 v1(1195,3285)
CSI0-DAT19: M1.B44 U17.5 | length 2713.6
  Top Layer w4.7: v1(1005,3370) 1005,3385 1035,3415 1035,3440 1028.74,3446.26 U17.5@1028.74,3475 ; v1(1160,3345) 1170,3345 1240,3275 1710,3275 1925,3060 2595,3060 2700,2955 2700,2520 2573.7,2393.7 M1.B44@2460.63,2393.7
  Bottom Layer w4.7: v1(1005,3370) 1045,3370 1070,3345 v1(1160,3345)
CSI0-HSYNCH: M1.B46 U17.39 | length 2736.4
  Top Layer w4.7: U17.39@920.47,3524.21 879.21,3524.21 855,3500 855,3435 920,3370 920,3350 960,3310 1060,3310 1185,3185 1535,3185 1560,3160 1625,3160 1845,2940 2505,2940 v1(2520,2925) ; M1.B46@2460.63,2374.02 2580.98,2374.02 v1(2585,2370)
  Bottom Layer w4.7: v1(2520,2925) 2585,2860 v1(2585,2370)
CSI0-PIXCLK: M1.B48 U17.11 | length 2654.5
  Top Layer w4.7: U17.11@1156.69,3504.53 1156.69,3424.66 1170,3411.35 1170,3364.7 1244.7,3290 1720,3290 1935,3075 2605,3075 2715,2965 2715,2510 2615,2410 2615,2368.65 2600,2353.65 2461.31,2353.65 M1.B48@2460.63,2354.33
CSI0-RST-B: M1.B52 R96.1 | length 2860.9
  Top Layer w4.7: R96.1@644.87,3630 644.87,3570.13 730,3485 800.6,3485 825.6,3460 825.6,3421.96 890.9,3356.66 890.9,3337.95 947.95,3280.9 1047.95,3280.9 1183.55,3145.3 1514.7,3145.3 1545,3115 1600,3115 1820,2895 2470,2895 2515,2850 v1(2520,2850) ; M1.B52@2460.63,2314.96 2519.96,2314.96 v1(2520,2315)
  Bottom Layer w4.7: v1(2520,2315) v1(2520,2850)
CSI0-VSYNCH: M1.B50 U17.37 | length 2759.3
  Top Layer w4.7: U17.37@920.47,3563.58 884.86,3563.58 835.3,3514.02 835.3,3425.98 900.6,3360.68 900.6,3341.96 951.96,3290.6 1051.96,3290.6 1187.56,3155 1525,3155 1550,3130 1610,3130 1830,2910 2480,2910 2515,2875 v1(2520,2875) ; M1.B50@2460.63,2334.65 2540.35,2334.65 v1(2545,2330)
  Bottom Layer w4.7: v1(2520,2875) 2545,2850 v1(2545,2330)
CSI1-DAT12: M1.B33 U19.17 | length 1354.4
  Top Layer w4.7: U19.17@1156.69,2882.64 1187.36,2882.64 1193.95,2876.05 1238.95,2876.05 1250,2865 1505,2865 v1(1510,2870) ; v1(1510,2830) 1525,2830 1800,2555 1900,2555 1962.87,2492.13 M1.B33@2326.77,2492.13
  Bottom Layer w4.7: v1(1510,2830) v1@1510,2865
CSI1-DAT13: M1.B31 U19.16 | length 1320.8
  Top Layer w4.7: U19.16@1156.69,2862.95 1159.65,2860 1180,2860 1186.35,2866.35 1228.65,2866.35 1245,2850 1525,2850 1805,2570 1905,2570 1963.19,2511.81 M1.B31@2326.77,2511.81
CSI1-DAT14: M1.B35 U19.10 | length 1377
  Top Layer w4.7: U19.10@1127.16,2735 1127.16,2617.84 1205,2540 1895,2540 1962.56,2472.44 M1.B35@2326.77,2472.44
CSI1-DAT15: M1.B41 U19.9 | length 1476.9
  Top Layer w4.7: v1(1080,2595) 1090,2595 1190,2495 1880,2495 1961.61,2413.39 M1.B41@2326.77,2413.39 ; v1(1105,2680) 1107.48,2682.48 U19.9@1107.48,2735 U19.9@1105,2732.52
  Bottom Layer w4.7: v1(1080,2595) 1105,2620 v1(1105,2680)
CSI1-DAT16: M1.B37 U19.8 | length 1413.2
  Top Layer w4.7: U19.8@1087.8,2735 1087.8,2637.2 1200,2525 1890,2525 1962.24,2452.76 M1.B37@2326.77,2452.76
CSI1-DAT17: M1.B39 U19.7 | length 1442.2
  Top Layer w4.7: U19.7@1068.11,2735 1068.11,2636.89 1195,2510 1885,2510 1960.3,2434.7 2326.77,2434.7 M1.B39@2326.77,2433.07
CSI1-DAT18: M1.B47 U19.6 | length 1557.1
  Top Layer w4.7: U19.6@1048.43,2735 1048.43,2701.57 1051.35,2698.65 v1(1051.35,2665) ; v1(1050,2530) 1095,2530 1175,2450 1865,2450 1960.67,2354.33 M1.B47@2326.77,2354.33
  Bottom Layer w4.7: v1(1050,2530) 1050,2665 v1(1051.35,2665)
CSI1-DAT19: M1.B43 U19.5 | length 1511.9
  Top Layer w4.7: U19.5@1028.74,2735 1028.74,2711.26 1035,2705 1035,2605 1080,2560 1105,2560 1185,2480 1875,2480 1961.3,2393.7 M1.B43@2326.77,2393.7
CSI1-HSYNCH: M1.B45 U19.39 | length 1754.7
  Top Layer w4.7: U19.39@920.47,2784.21 919.91,2783.65 873.65,2783.65 858.65,2768.65 858.65,2675 898.65,2635 980,2635 1070,2545 1100,2545 1180,2465 1870,2465 1960.98,2374.02 M1.B45@2326.77,2374.02
CSI1-PIXCLK: M1.B51 U19.11 | length 1625.6
  Top Layer w4.7: v1(1080,2490) 1095,2490 1165,2420 1855,2420 1960.04,2314.96 M1.B51@2326.77,2314.96 ; v1(1155,2670) 1156.69,2671.69 U19.11@1156.69,2764.53
  Bottom Layer w4.7: v1(1080,2490) 1155,2565 v1(1155,2670)
CSI1-RST-B: M1.B29 R109.1 | length 2257.5
  Top Layer w4.7: R109.1@644.87,2885 644.87,2830.13 735,2740 800,2740 815,2725 815,2665 890,2590 910,2590 1045,2455 1090,2455 1155,2390 1845,2390 1960,2275 v1(2135,2275) ; v1(2135,2530) 2136.5,2531.5 M1.B29@2326.77,2531.5
  Bottom Layer w4.7: v1(2135,2275) v1(2135,2530)
CSI1-VSYNCH: M1.B49 U19.37 | length 1849.2
  Top Layer w4.7: U19.37@920.47,2823.58 880.46,2823.58 863.65,2806.77 863.65,2793.65 848.95,2778.95 848.95,2670.98 899.93,2620 970,2620 1015,2575 1015,2530 1035,2510 1095,2510 1170,2435 1860,2435 1960.35,2334.65 M1.B49@2326.77,2334.65
DVDD-1V8-VIDEO1: C71.1 C72.1 C92.2 C93.2 L10.2 U17.14 U17.36 | length 566
  Top Layer w10: v1(885,3585) 886.73,3583.27 U17.36@920.47,3583.27 ; U17.14@1156.69,3563.58 1178.58,3563.58 v1(1185,3570)
  Bottom Layer w10: v1(885,3585) 890,3585 900.13,3595.13 C93.2@920,3595.13
  Bottom Layer w15: C93.2@920,3595.13 955.13,3560 1115,3560 1130.13,3575.13 C92.2@1155,3575.13 1179.87,3575.13 v1(1185,3570) 1190,3565 C71.1@1209.87,3565 1209.87,3535.13 1220,3525 C72.1@1220,3500 1218.5,3498.5 L10.2@1218.5,3425
DVDD-1V8-VIDEO2: C101.1 C102.1 C122.2 C123.2 L14.2 U19.14 U19.36 | length 559.8
  Top Layer w10: v1(885,2845) 886.73,2843.27 U19.36@920.47,2843.27 ; U19.14@1156.69,2823.58 1183.58,2823.58 v1(1185,2825)
  Bottom Layer w15: v1(885,2845) 914.87,2845 C123.2@920,2850.13 955.13,2815 1105,2815 1120.13,2830.13 C122.2@1155,2830.13 1179.87,2830.13 v1(1185,2825) C101.1@1209.87,2825 1209.87,2805.13 1220,2795 C102.1@1220,2760 1218.5,2758.5 L14.2@1218.5,2685
DVDDL-RGMII: C33.1 C34.1 L6.2 L7.1 R36.2 U11.47 | length 1352.5
  Top Layer w4.7: v1(6000,4005) 5995,4010 5995,4075 6015,4095 R36.2@6055.13,4095
  Top Layer w12: v1(6000,4005) 6110,4005 6138.92,4033.92 U11.47@6193.36,4033.92
  Bottom Layer w15: C34.1@5970,3794.87 5940.13,3794.87 5920,3815 5925,3820 5925,3930 v1(6000,4005)
  Bottom Layer w20: C34.1@5970,3794.87 6029.87,3794.87 C33.1@6035,3800 ; L6.2@6150,3796.26 6150,3745 6185,3710 6415,3710 6505,3800 L7.1@6505,3883.5
  Bottom Layer w25: C33.1@6035,3800 6038.74,3796.26 L6.2@6150,3796.26
ENET-REF-CLK: M1.C28 R44.1 | length 2193.1
  Top Layer w3.8: M1.C28@4720.47,3633.86 5483.86,3633.86 5790,3940 5870,3940 v1(5940,4010)
  Top Layer w4.7: R44.1@6455,4375.13 6499.87,4375.13 v1(6500,4375)
  Bottom Layer w4.7: v1(5940,4010) 5975,4045 5975,4090 6005,4120 6160,4120 6250,4210 6335,4210 6403.65,4278.65 6463.65,4278.65 6500,4315 v1(6500,4375)
ETH-SH-GND: C44.2 J3.SH1 J3.SH2 R43.1
ETH-VDDIO-REG: C28.1 C29.1 M1.C37 R47.2 R48.2 U11.29 | length 3210.7
  Top Layer w4.7: R47.2@6275,4374.87 6275,4405 v1(6280,4410) ; R48.2@6319.87,4440 6320,4440.13 v1(6320,4475)
  Top Layer w12: 4500,3585 4500,3555 4519.57,3535.43 M1.C37@4586.61,3535.43 ; U11.29@6336.57,4224.38 6336.57,4276.57 v1(6340,4280)
  Top Layer w20: 4500,3585 4500,3915 4560,3975 5295,3975 5680,4360 v2(5875,4360)
  Bottom Layer w4.7: v1(6280,4410) 6280,4425 6295,4440 6320,4440 ; v1(6320,4475) 6320,4440 ; 6363.5,4440 6320,4440
  Bottom Layer w20: v2(5875,4360) 5940,4425 6080,4425 6200,4545 6340,4545 6363.5,4521.5 6363.5,4440 6363.5,4348.5 ; v1(6340,4280) 6340,4325 6363.5,4348.5 ; C28.1@6405,4344.87 C29.1@6465,4344.87 ; C28.1@6405,4348.5 6363.5,4348.5
ETH-WOL-INT: M1.C32 R38.1 U11.40 | length 1797.1
  Top Layer w4.7: M1.C32@4720.47,3594.49 5514.49,3594.49 5740,3820 v1(5770,3820) ; v1(5770,3885) 5805,3920 5890,3920 5970,4000 5970,4090 5995,4115 6080,4115 6095.13,4130.13 R38.1@6095.13,4140 6135,4140 6139.16,4144.16 U11.40@6193.36,4144.16
  Bottom Layer w4.7: v1(5770,3820) v1(5770,3885)
ETH_AVDDL: C37.1 C38.1 C39.1 C40.1 L7.2 U11.8 U11.13 U11.19 U11.44 | length 443.6
  Top Layer w12: v1(6145,4070) 6156.17,4081.17 U11.44@6193.36,4081.17 ; U11.8@6336.57,3985.2 6336.57,3923.43 v1(6340,3920) ; U11.13@6432.54,4018.18 6461.82,4018.18 6480,4000 v1(6500,4000) ; U11.19@6432.54,4112.66 6467.66,4112.66 v1(6470,4115)
  Bottom Layer w12: C40.1@6095.13,4055 6130,4055 v1(6145,4070) ; C37.1@6335,3954.87 6335,3925 v1(6340,3920) ; v1(6470,4115) 6475,4120 C39.1@6499.87,4120 ; C38.1@6499.87,4030 6500,4029.87 v1(6500,4000) 6500,3951.5 L7.2@6505,3946.5